# EAGLE board CC3000_WiFi_Shield_Panel_v10 (EAGLE 6.5.0), part 1 of 2
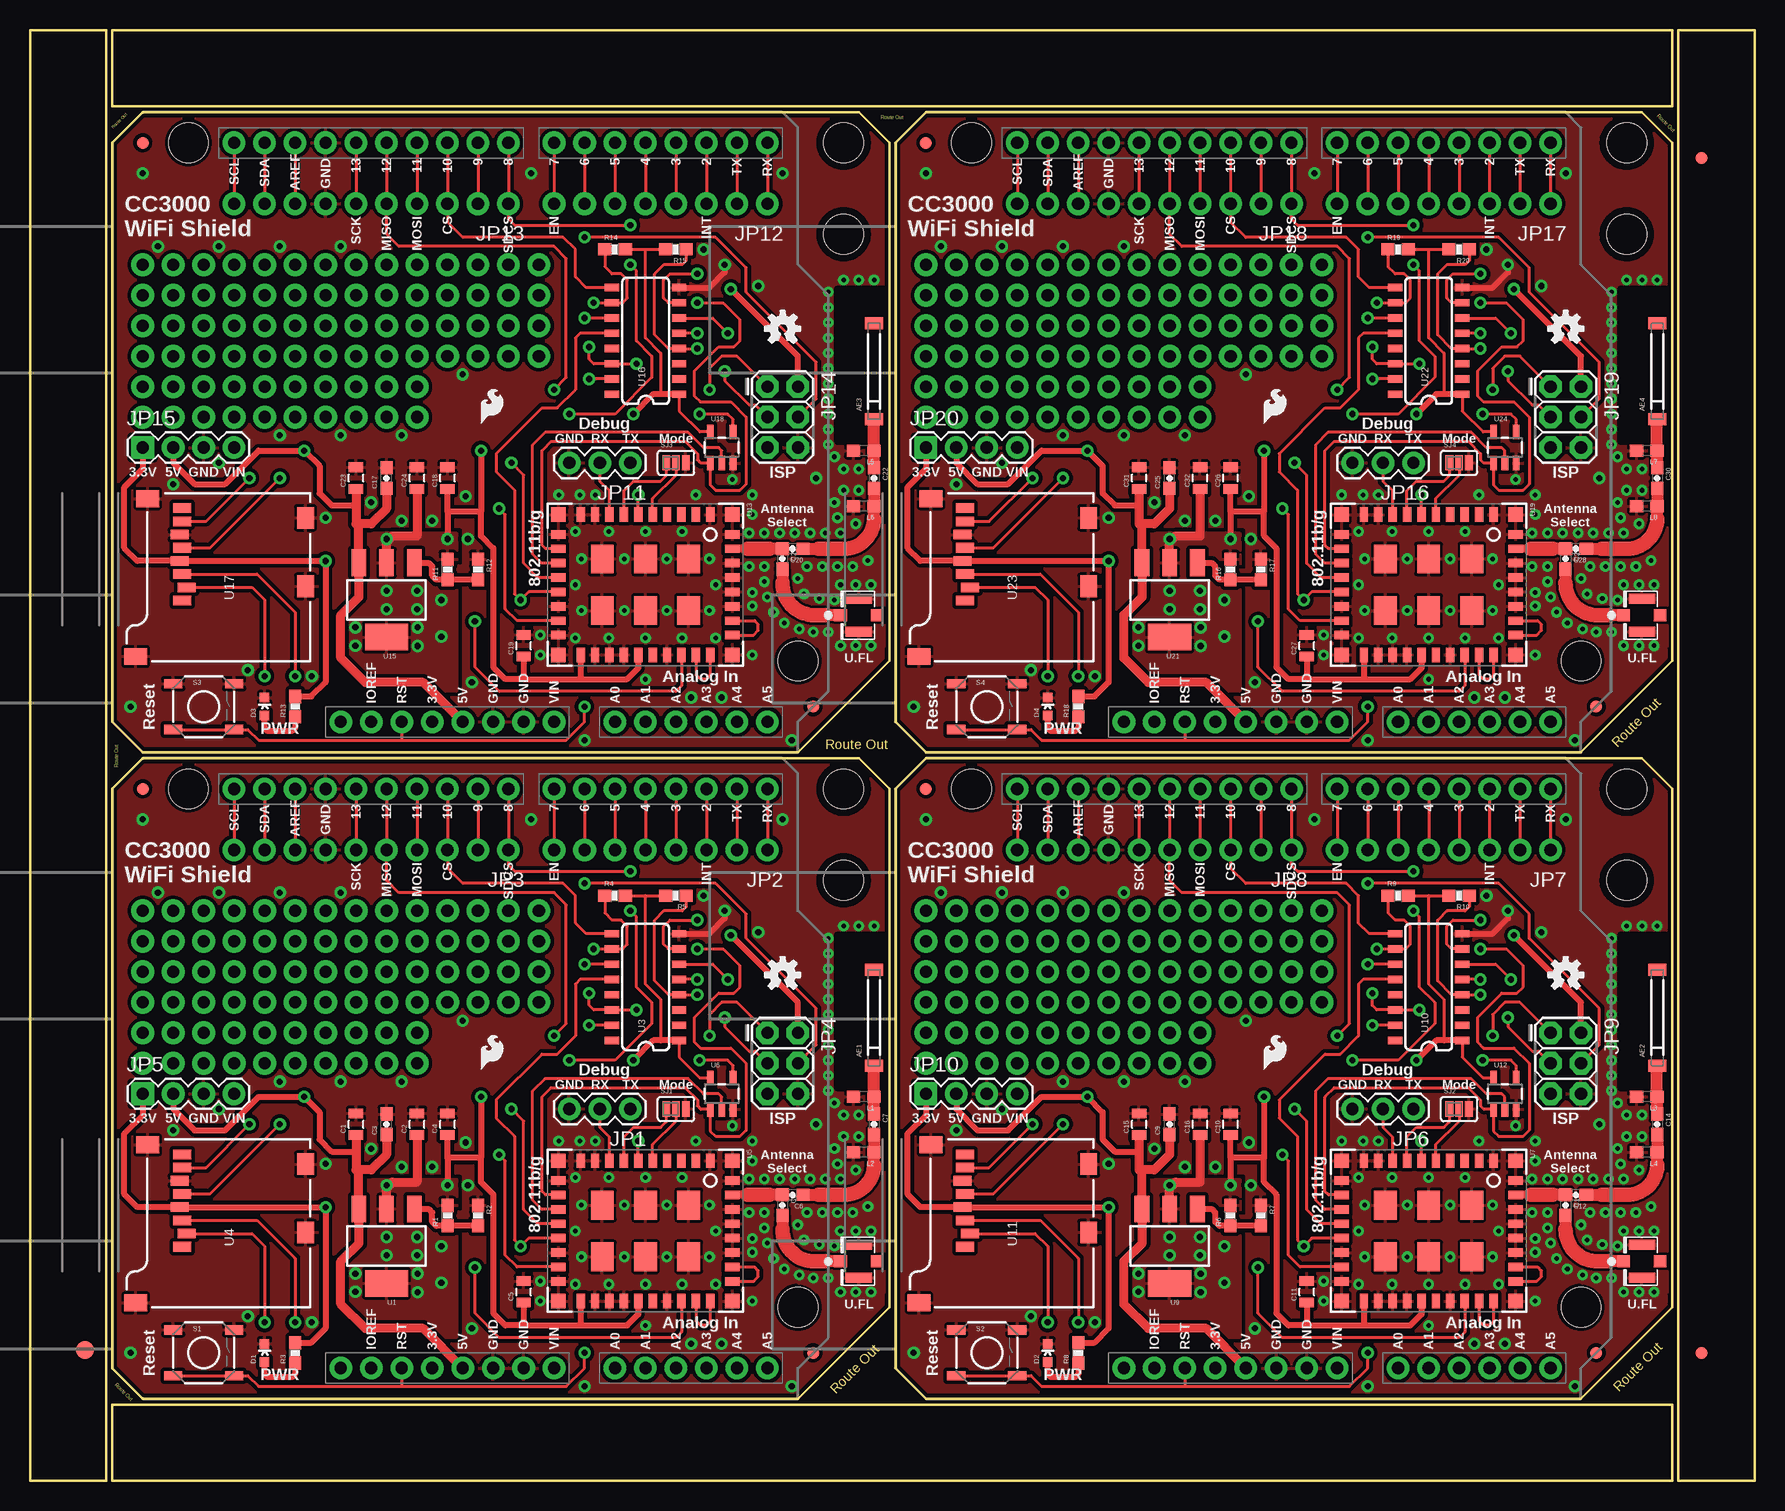
[diagram p0: board, top side]
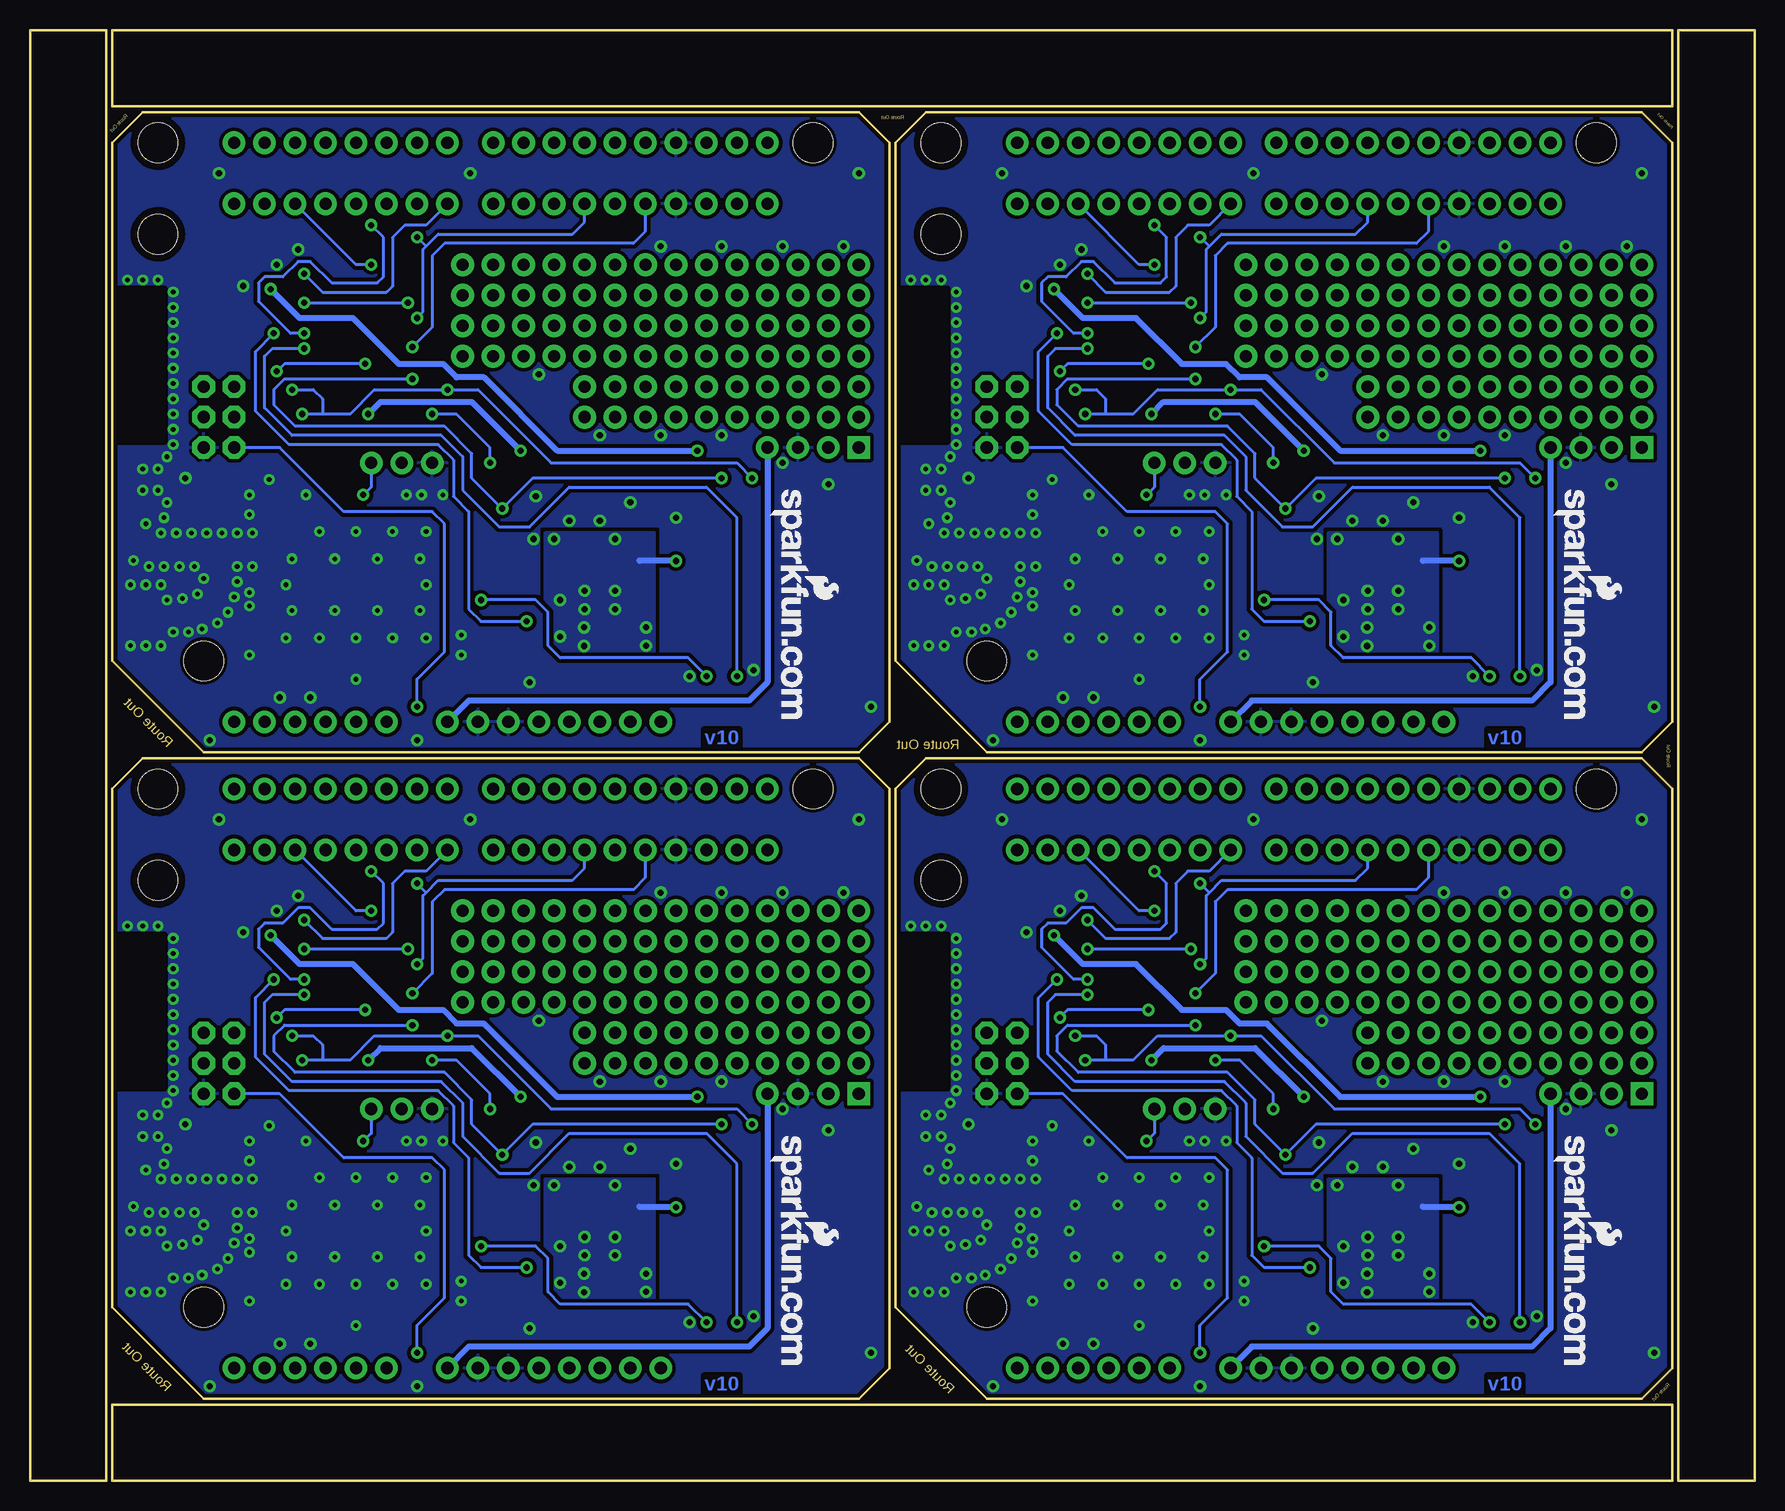
[diagram p1: board, bottom side, seen from below]

Size 143.76 x 120.9 mm. Coordinates in mm from the lower left corner, seen from the top.
Outline: 6.86,9.4 6.86,57.66 9.4,60.2 69.09,60.2 71.63,57.66 71.63,14.48 64.01,6.86 9.4,6.86 6.86,9.4
Outline: 72.14,9.4 72.14,57.66 74.68,60.2 134.37,60.2 136.91,57.66 136.91,14.48 129.29,6.86 74.68,6.86 72.14,9.4
Outline: 6.86,63.25 6.86,111.51 9.4,114.05 69.09,114.05 71.63,111.51 71.63,68.33 64.01,60.71 9.4,60.71 6.86,63.25
Outline: 72.14,63.25 72.14,111.51 74.68,114.05 134.37,114.05 136.91,111.51 136.91,68.33 129.29,60.71 74.68,60.71 72.14,63.25
Outline: 6.35,0 6.35,120.9 0,120.9 0,0 6.35,0
Outline: 6.86,0 136.91,0 136.91,6.35 6.86,6.35 6.86,0
Outline: 143.76,0 143.76,120.9 137.41,120.9 137.41,0 143.76,0
Outline: 136.91,120.9 6.86,120.9 6.86,114.55 136.91,114.55 136.91,120.9
Copper layers (1*16): Top 0.035mm / dielectric 1.5mm / Bottom 0.035mm
Design rules "SparkFun-2-layer": minimum track width 7mil, minimum drill 15mil, track to track 8mil, track to pad 8mil, pad to pad 8mil, via to via 8mil, smd to smd 8mil, copper to edge 8mil, drill to drill 8mil, minimum pad ring 12mil, minimum via ring 10mil, stop-mask expansion 4mil, vias tented up to drill 20mil, thermal gap 10mil
Holes 3.3 mm at 13.21,57.66 64.01,14.48 78.49,57.66 129.29,14.48 13.21,111.51 64.01,68.33 78.49,111.51 129.29,68.33
tRestrict: area 68.3,17.5 to 69.8,19.1; area 67.3,43.4 to 71.1,45.5; area 67.3,32.8 to 69.3,45.5; area 69.3,35.3 to 71.1,41.9; area 133.6,17.5 to 135.1,19.1; area 132.6,43.4 to 136.4,45.5; area 132.6,32.8 to 134.6,45.5; area 134.6,35.3 to 136.4,41.9; area 68.3,71.4 to 69.8,72.9; area 67.3,97.3 to 71.1,99.3; area 67.3,86.6 to 69.3,99.3; area 69.3,89.2 to 71.1,95.8; 4 more areas
bRestrict: area 67.3,32.8 to 71.1,45.5; area 132.6,32.8 to 136.4,45.5; area 67.3,86.6 to 71.1,99.3; area 132.6,86.6 to 136.4,99.3

## Footprints (pad centres in the part's own frame; a part is rotated, then mirrored left to right if it is on the bottom)
ANTENNA-CHIP_2500AT44M0400 = smd 1 x 1.5: FEED -4,0; NC 4,0
0805 = smd 0.8 x 1.2: 1 -0.9,0; 2 0.9,0
0603-CAP = smd 1.1 x 1: 1 -0.85,0; 2 0.85,0
LED-0603 = smd 0.8 x 0.8: A 0,-0.75; C 0,0.75
FIDUCIAL-1.5X3 = smd 1.5 x 1.5: 1 0,0
FIDUCIAL-1X2 = smd 1 x 1: 1 0,0
U.FL = smd 2.2 x 0.85: P$1 0,1.375; P$2 0,-1.375 | smd 1.05 x 1: P$3 1.525,0; P$4 -1.525,0
1X03 = drill 1.016 pad 1.88: 1 0,0; 2 2.54,0; 3 5.08,0
1X08_NO_SILK = drill 1.016 pad 1.88: 1 0,0; 2 2.54,0; 3 5.08,0; 4 7.62,0; 5 10.16,0; 6 12.7,0; 7 15.24,0; 8 17.78,0
1X10_NO_SILK = drill 1.016 pad 1.88: 1 0,0; 2 2.54,0; 3 5.08,0; 4 7.62,0; 5 10.16,0; 6 12.7,0; 7 15.24,0; 8 17.78,0; 9 20.32,0; 10 22.86,0
2X3 = drill 1.016 pad 1.88 octagon: 1 0,0; 2 0,2.54; 3 2.54,0; 4 2.54,2.54; 5 5.08,0; 6 5.08,2.54
1X04 = drill 1.016 pad 1.88 square: 1 0,0 | drill 1.016 pad 1.88: 2 2.54,0; 3 5.08,0; 4 7.62,0
0603 = smd 1.1 x 1: 1 -0.85,0; 2 0.85,0
0603-RES = smd 1.1 x 1: 1 -0.85,0; 2 0.85,0
TACTILE_SWITCH_SMD = smd 1.524 x 0.762: 1 -2.54,1.905; 2 2.54,1.905; 3 -2.54,-1.905; 4 2.54,-1.905
SJ_3_PASTE1&2 = smd 0.635 x 1.27: 1 -0.813,0; 2 0,0; 3 0.813,0
STAND-OFF = hole 3.302: 0,0
SOT223 = smd 1.219 x 2.235: 1 -2.311,-3.099; 2 0,-3.099; 3 2.311,-3.099 | smd 3.6 x 2.2: 4 0,3.099
UNO_R3_SHIELD_NOLABELS = drill 1.016 pad 1.88: 3.3V 50.8,26.67; 5V 50.8,29.21; A0 50.8,41.91; A1 50.8,44.45; A2 50.8,46.99; A3 50.8,49.53; A4 50.8,52.07; A5 50.8,54.61; AREF 2.54,15.24; D2 2.54,49.53; D3 2.54,46.99; D4 2.54,44.45; D5 2.54,41.91; D6 2.54,39.37; D7 2.54,36.83; D8 2.54,33.02; D9 2.54,30.48; D10 2.54,27.94; D11 2.54,25.4; D12 2.54,22.86; D13 2.54,20.32; GND@0 50.8,31.75; GND@1 50.8,34.29; GND@2 2.54,17.78; IOREF 50.8,21.59; NC 50.8,19.05; RES 50.8,24.13; RX 2.54,54.61; SCL 2.54,10.16; SDA 2.54,12.7; TX 2.54,52.07; VIN 50.8,36.83
SO016 = smd 0.6 x 1.2: 1 -4.445,-2.8; 2 -3.175,-2.8; 3 -1.905,-2.8; 4 -0.635,-2.8; 5 0.635,-2.8; 6 1.905,-2.8; 7 3.175,-2.8; 8 4.445,-2.8; 9 4.445,2.8; 10 3.175,2.8; 11 1.905,2.8; 12 0.635,2.8; 13 -0.635,2.8; 14 -1.905,2.8; 15 -3.175,2.8; 16 -4.445,2.8
MICRO-SD-SOCKET-PP = smd 0.8 x 1.5: 1 -8.94,10.7; 2 -7.84,10.3; 3 -6.74,10.7; 4 -5.64,10.9; 5 -4.54,10.7; 6 -3.44,10.9; 7 -2.34,10.7; 8 -1.24,10.7 | smd 1.8 x 1.4: CD1 -2.05,0.4; CD2 -7.75,0.4 | smd 1.4 x 1.9: GND1 -13.6,14.55; GND3 -0.45,13.55
QFN-46_CC3000 = smd 2.4 x 1.9: GND@37 -2.15,3.6; GND@38 -2.15,0; GND@39 -2.15,-3.6; GND@40 2.15,3.6; GND@41 2.15,0; GND@42 2.15,-3.6 | smd 1.2 x 1.2: GND@43 -5.85,7.25; GND@44 -5.85,-7.25; GND@45 5.85,-7.25; GND@46 5.85,7.25 | smd 1.2 x 0.7: P$1 -5.85,5.4; P$2 -5.85,4.2; P$3 -5.85,3; P$4 -5.85,1.8; P$5 -5.85,0.6; P$6 -5.85,-0.6; P$7 -5.85,-1.8; P$8 -5.85,-3; P$9 -5.85,-4.2; P$10 -5.85,-5.4; P$19 5.85,-5.4; P$20 5.85,-4.2; P$21 5.85,-3; P$22 5.85,-1.8; P$23 5.85,-0.6; P$24 5.85,0.6; P$25 5.85,1.8; P$26 5.85,3; P$27 5.85,4.2; P$28 5.85,5.4 | smd 0.7 x 1.2: P$11 -4.2,-7.25; P$12 -3,-7.25; P$13 -1.8,-7.25; P$14 -0.6,-7.25; P$15 0.6,-7.25; P$16 1.8,-7.25; P$17 3,-7.25; P$18 4.2,-7.25; P$29 4.2,7.25; P$30 3,7.25; P$31 1.8,7.25; P$32 0.6,7.25; P$33 -0.6,7.25; P$34 -1.8,7.25; P$35 -3,7.25; P$36 -4.2,7.25
SOT23-5 = smd 0.55 x 1.2: 1 -0.95,-1.3; 2 0,-1.3; 3 0.95,-1.3; 4 0.95,1.3; 5 -0.95,1.3

## Placement (x,y rotation side)
AE1  ANTENNA22500AT44M0400  [ANTENNA-CHIP_2500AT44M0400]  70.36,38.61 90 top
AE2  ANTENNA22500AT44M0400  [ANTENNA-CHIP_2500AT44M0400]  135.64,38.61 90 top
AE3  ANTENNA22500AT44M0400  [ANTENNA-CHIP_2500AT44M0400]  70.36,92.46 90 top
AE4  ANTENNA22500AT44M0400  [ANTENNA-CHIP_2500AT44M0400]  135.64,92.46 90 top
C1  10uF  [0805]  27.18,29.72 90 top
C2  10uF  [0805]  32.26,29.72 90 top
C3  0.1uF  [0603-CAP]  29.72,29.72 90 top
C4  1uF  [0805]  34.8,29.72 90 top
C5  1uF  [0805]  41.15,15.75 90 top
C6  10pF  [0603-CAP]  63.58,23.83 180 top
C7  2.2pF  [0603-CAP]  70.36,29.72 270 top
C8  DNP  [0603-CAP]  62.71,22.99 270 top
C9  0.1uF  [0603-CAP]  95,29.72 90 top
C10  1uF  [0805]  100.08,29.72 90 top
C11  1uF  [0805]  106.43,15.75 90 top
C12  10pF  [0603-CAP]  128.85,23.83 180 top
C13  DNP  [0603-CAP]  127.99,22.99 270 top
C14  2.2pF  [0603-CAP]  135.64,29.72 270 top
C15  10uF  [0805]  92.46,29.72 90 top
C16  10uF  [0805]  97.54,29.72 90 top
C17  0.1uF  [0603-CAP]  29.72,83.57 90 top
C18  1uF  [0805]  34.8,83.57 90 top
C19  1uF  [0805]  41.15,69.6 90 top
C20  10pF  [0603-CAP]  63.58,77.67 180 top
C21  DNP  [0603-CAP]  62.71,76.83 270 top
C22  2.2pF  [0603-CAP]  70.36,83.57 270 top
C23  10uF  [0805]  27.18,83.57 90 top
C24  10uF  [0805]  32.26,83.57 90 top
C25  0.1uF  [0603-CAP]  95,83.57 90 top
C26  1uF  [0805]  100.08,83.57 90 top
C27  1uF  [0805]  106.43,69.6 90 top
C28  10pF  [0603-CAP]  128.85,77.67 180 top
C29  DNP  [0603-CAP]  127.99,76.83 270 top
C30  2.2pF  [0603-CAP]  135.64,83.57 270 top
C31  10uF  [0805]  92.46,83.57 90 top
C32  10uF  [0805]  97.54,83.57 90 top
D1  GREEN  [LED-0603]  19.56,10.67 0 top
D2  GREEN  [LED-0603]  84.84,10.67 0 top
D3  GREEN  [LED-0603]  19.56,64.52 0 top
D4  GREEN  [LED-0603]  84.84,64.52 0 top
E$1  [FIDUCIAL-1.5X3]  4.57,10.92 0 top
E$4  [FIDUCIAL-1X2]  139.32,10.67 0 top
E$5  [FIDUCIAL-1X2]  139.32,110.24 180 top
FID1  FIDUCIAL1X2  [FIDUCIAL-1X2]  65.28,10.67 0 top
FID2  FIDUCIAL1X2  [FIDUCIAL-1X2]  9.4,57.66 0 top
FID3  FIDUCIAL1X2  [FIDUCIAL-1X2]  130.56,10.67 0 top
FID4  FIDUCIAL1X2  [FIDUCIAL-1X2]  74.68,57.66 0 top
FID5  FIDUCIAL1X2  [FIDUCIAL-1X2]  65.28,64.52 0 top
FID6  FIDUCIAL1X2  [FIDUCIAL-1X2]  9.4,111.51 0 top
FID7  FIDUCIAL1X2  [FIDUCIAL-1X2]  130.56,64.52 0 top
FID8  FIDUCIAL1X2  [FIDUCIAL-1X2]  74.68,111.51 0 top
J1  U.FL  [U.FL]  69.09,18.29 180 top
J2  U.FL  [U.FL]  134.37,18.29 180 top
J3  U.FL  [U.FL]  69.09,72.14 180 top
J4  U.FL  [U.FL]  134.37,72.14 180 top
JP1  Debug  [1X03]  50.04,30.99 180 top
JP2  [1X08_NO_SILK]  61.47,52.58 180 top
JP3  M10NO_SILK  [1X10_NO_SILK]  39.88,52.58 180 top
JP4  AVR_SPI_PRG_6PTH  [2X3]  61.47,37.34 270 top
JP5  [1X04]  9.4,32.26 0 top
JP6  Debug  [1X03]  115.32,30.99 180 top
JP7  [1X08_NO_SILK]  126.75,52.58 180 top
JP8  M10NO_SILK  [1X10_NO_SILK]  105.16,52.58 180 top
JP9  AVR_SPI_PRG_6PTH  [2X3]  126.75,37.34 270 top
JP10  [1X04]  74.68,32.26 0 top
JP11  Debug  [1X03]  50.04,84.84 180 top
JP12  [1X08_NO_SILK]  61.47,106.43 180 top
JP13  M10NO_SILK  [1X10_NO_SILK]  39.88,106.43 180 top
JP14  AVR_SPI_PRG_6PTH  [2X3]  61.47,91.19 270 top
JP15  [1X04]  9.4,86.11 0 top
JP16  Debug  [1X03]  115.32,84.84 180 top
JP17  [1X08_NO_SILK]  126.75,106.43 180 top
JP18  M10NO_SILK  [1X10_NO_SILK]  105.16,106.43 180 top
JP19  AVR_SPI_PRG_6PTH  [2X3]  126.75,91.19 270 top
JP20  [1X04]  74.68,86.11 0 top
L1  DNP  [0603]  69.49,32 180 top
L2  2.2nH  [0603]  69.49,27.38 180 top
L3  DNP  [0603]  134.77,32 180 top
L4  2.2nH  [0603]  134.77,27.38 180 top
L5  DNP  [0603]  69.49,85.85 180 top
L6  2.2nH  [0603]  69.49,81.23 180 top
L7  DNP  [0603]  134.77,85.85 180 top
L8  2.2nH  [0603]  134.77,81.23 180 top
LOGO1  OSHW-LOGOS  [OSHW-LOGO-S]  62.74,42.16 0 top
LOGO2  LOGO-SFENEW  [SFE-NEW-WEBLOGO]  16.76,28.7 270 bottom
LOGO3  LOGO-SFESK  [SFE-LOGO-FLAME]  37.59,34.29 0 top
LOGO4  OSHW-LOGOS  [OSHW-LOGO-S]  128.02,42.16 0 top
LOGO5  LOGO-SFENEW  [SFE-NEW-WEBLOGO]  82.04,28.7 270 bottom
LOGO6  LOGO-SFESK  [SFE-LOGO-FLAME]  102.87,34.29 0 top
LOGO7  OSHW-LOGOS  [OSHW-LOGO-S]  62.74,96.01 0 top
LOGO8  LOGO-SFENEW  [SFE-NEW-WEBLOGO]  16.76,82.55 270 bottom
LOGO9  LOGO-SFESK  [SFE-LOGO-FLAME]  37.59,88.14 0 top
LOGO10  OSHW-LOGOS  [OSHW-LOGO-S]  128.02,96.01 0 top
LOGO11  LOGO-SFENEW  [SFE-NEW-WEBLOGO]  82.04,82.55 270 bottom
LOGO12  LOGO-SFESK  [SFE-LOGO-FLAME]  102.87,88.14 0 top
R1  240  [0603-RES]  34.8,22.1 90 top
R2  390  [0603-RES]  37.34,22.1 270 top
R3  390  [0603-RES]  22.1,10.67 90 top
R4  10k  [0603-RES]  48.77,48.77 0 top
R5  10k  [0603-RES]  53.85,48.77 180 top
R6  240  [0603-RES]  100.08,22.1 90 top
R7  390  [0603-RES]  102.62,22.1 270 top
R8  390  [0603-RES]  87.38,10.67 90 top
R9  10k  [0603-RES]  114.05,48.77 0 top
R10  10k  [0603-RES]  119.13,48.77 180 top
R11  240  [0603-RES]  34.8,75.95 90 top
R12  390  [0603-RES]  37.34,75.95 270 top
R13  390  [0603-RES]  22.1,64.52 90 top
R14  10k  [0603-RES]  48.77,102.62 0 top
R15  10k  [0603-RES]  53.85,102.62 180 top
R16  240  [0603-RES]  100.08,75.95 90 top
R17  390  [0603-RES]  102.62,75.95 270 top
R18  390  [0603-RES]  87.38,64.52 90 top
R19  10k  [0603-RES]  114.05,102.62 0 top
R20  10k  [0603-RES]  119.13,102.62 180 top
S1  RESET  [TACTILE_SWITCH_SMD]  14.48,10.67 0 top
S2  RESET  [TACTILE_SWITCH_SMD]  79.76,10.67 0 top
S3  RESET  [TACTILE_SWITCH_SMD]  14.48,64.52 0 top
S4  RESET  [TACTILE_SWITCH_SMD]  79.76,64.52 0 top
SJ1  Mode  [SJ_3_PASTE1&2]  53.85,30.99 0 top
SJ2  Mode  [SJ_3_PASTE1&2]  119.13,30.99 0 top
SJ3  Mode  [SJ_3_PASTE1&2]  53.85,84.84 0 top
SJ4  Mode  [SJ_3_PASTE1&2]  119.13,84.84 0 top
STANDOFF1  STAND-OFF  [STAND-OFF]  67.82,57.66 0 top
STANDOFF2  STAND-OFF  [STAND-OFF]  67.82,50.04 0 top
STANDOFF3  STAND-OFF  [STAND-OFF]  133.1,57.66 0 top
STANDOFF4  STAND-OFF  [STAND-OFF]  133.1,50.04 0 top
STANDOFF5  STAND-OFF  [STAND-OFF]  67.82,111.51 0 top
STANDOFF6  STAND-OFF  [STAND-OFF]  67.82,103.89 0 top
STANDOFF7  STAND-OFF  [STAND-OFF]  133.1,111.51 0 top
STANDOFF8  STAND-OFF  [STAND-OFF]  133.1,103.89 0 top
U1  LM1117  [SOT223]  29.72,19.56 180 top
U2  ARDUINO_R3_SHIELDNOLABELS  [UNO_R3_SHIELD_NOLABELS]  6.86,60.2 270 top
U3  74HC4050  [SO016]  51.31,41.15 90 top
U4  USD-SOCKETNEW  [MICRO-SD-SOCKET-PP]  23.37,28.45 90 top
U5  CC3000  [QFN-46_CC3000]  51.31,20.83 270 top
U6  74AHC1G125  [SOT23-5]  57.66,32.26 0 top
U7  CC3000  [QFN-46_CC3000]  116.59,20.83 270 top
U8  ARDUINO_R3_SHIELDNOLABELS  [UNO_R3_SHIELD_NOLABELS]  72.14,60.2 270 top
U9  LM1117  [SOT223]  95,19.56 180 top
U10  74HC4050  [SO016]  116.59,41.15 90 top
U11  USD-SOCKETNEW  [MICRO-SD-SOCKET-PP]  88.65,28.45 90 top
U12  74AHC1G125  [SOT23-5]  122.94,32.26 0 top
U13  CC3000  [QFN-46_CC3000]  51.31,74.68 270 top
U14  ARDUINO_R3_SHIELDNOLABELS  [UNO_R3_SHIELD_NOLABELS]  6.86,114.05 270 top
U15  LM1117  [SOT223]  29.72,73.41 180 top
U16  74HC4050  [SO016]  51.31,95 90 top
U17  USD-SOCKETNEW  [MICRO-SD-SOCKET-PP]  23.37,82.3 90 top
U18  74AHC1G125  [SOT23-5]  57.66,86.11 0 top
U19  CC3000  [QFN-46_CC3000]  116.59,74.68 270 top
U20  ARDUINO_R3_SHIELDNOLABELS  [UNO_R3_SHIELD_NOLABELS]  72.14,114.05 270 top
U21  LM1117  [SOT223]  95,73.41 180 top
U22  74HC4050  [SO016]  116.59,95 90 top
U23  USD-SOCKETNEW  [MICRO-SD-SOCKET-PP]  88.65,82.3 90 top
U24  74AHC1G125  [SOT23-5]  122.94,86.11 0 top

## Library data of the parts
AE1-AE4 U5 U7 U13 U19 = SparkFun-RF
C1-C5 C8-C11 C13 C15-C19 C21 C23-C27 C29 C31 C32 = SparkFun-Capacitors
C6 C12 C20 C28 = SparkFun-Capacitors; COEFF: C0G; TOL: 5%
C7 C14 C22 C30 = SparkFun-Capacitors; COEFF: C0G; TOL: 10%
D1-D4 = SparkFun-LED; PROD_ID: DIO-00821
E$1 E$4 E$5 FID1-FID8 LOGO1-LOGO12 = SparkFun-Aesthetics
J1-J4 JP1-JP20 U4 U11 U17 U23 = SparkFun-Connectors
L1-L8 SJ1-SJ4 = SparkFun-Passives
R1-R20 = SparkFun-Resistors
S1-S4 = SparkFun-Electromechanical; PROD_ID: SWCH-08247
STANDOFF1-STANDOFF8 = SparkFun-Electromechanical
U1 U9 U15 U21 = SparkFun-PowerIC
U2 U8 U14 U20 = SparkFun-Boards
U3 U6 U10 U12 U16 U18 U22 U24 = SparkFun-DigitalIC

## Nets
3.3V: C2.1 C4.1 C5.1 JP5.1 R1.2 R3.2 R4.2 R5.2 U1.2 U1.4 U3.1 U4.4 U5.P$19 U5.P$23 U6.5
3.3V1: C10.1 C11.1 C16.1 JP10.1 R6.2 R8.2 R9.2 R10.2 U7.P$19 U7.P$23 U9.2 U9.4 U10.1 U11.4 U12.5
3.3V2: C18.1 C19.1 C24.1 JP15.1 R11.2 R13.2 R14.2 R15.2 U13.P$19 U13.P$23 U15.2 U15.4 U16.1 U17.4 U18.5
3.3V3: C26.1 C27.1 C32.1 JP20.1 R16.2 R18.2 R19.2 R20.2 U19.P$19 U19.P$23 U21.2 U21.4 U22.1 U23.4 U24.5
5V: C1.1 C3.1 JP4.2 JP5.2 U1.3 U2.5V
5V1: C9.1 C15.1 JP9.2 JP10.2 U8.5V U9.3
5V2: C17.1 C23.1 JP14.2 JP15.2 U14.5V U15.3
5V3: C25.1 C31.1 JP19.2 JP20.2 U20.5V U21.3
AREF: JP3.8 U2.AREF
AREF1: JP8.8 U8.AREF
AREF2: JP13.8 U14.AREF
AREF3: JP18.8 U20.AREF
CS_3.3V: R4.1 U3.10 U5.P$12 U6.1
CS_3.3V1: R9.1 U7.P$12 U10.10 U12.1
CS_3.3V2: R14.1 U13.P$12 U16.10 U18.1
CS_3.3V3: R19.1 U19.P$12 U22.10 U24.1
CS_5V: JP3.3 U2.D10 U3.9
CS_5V1: JP8.3 U8.D10 U10.9
CS_5V2: JP13.3 U14.D10 U16.9
CS_5V3: JP18.3 U20.D10 U22.9
EN_3.3V: U3.6 U5.P$26
EN_3.3V1: U7.P$26 U10.6
EN_3.3V2: U13.P$26 U16.6
EN_3.3V3: U19.P$26 U22.6
EN_5V: JP2.8 U2.D7 U3.7
EN_5V1: JP7.8 U8.D7 U10.7
EN_5V2: JP12.8 U14.D7 U16.7
EN_5V3: JP17.8 U20.D7 U22.7
GND: C1.2 C2.2 C3.2 C4.2 C5.2 D1.C J1.P$1 J1.P$2 JP1.3 JP3.7 JP4.6 JP5.3 L1.2 L2.2 R2.1 S1.1 S1.2 SJ1.3 U2.GND@0 U2.GND@1 U2.GND@2 U3.8 U4.6 U4.CD1 U4.CD2 U4.GND1 U4.GND3 U5.GND@37 U5.GND@38 U5.GND@39 U5.GND@40 U5.GND@41 U5.GND@42 U5.GND@43 U5.GND@44 U5.GND@45 U5.GND@46 U5.P$1 U5.P$9 U5.P$10 U5.P$11 U5.P$16 U5.P$18 U5.P$20 U5.P$21 U5.P$22 U5.P$25 U5.P$31 U5.P$32 U5.P$33 U5.P$34 U5.P$36 U6.3
GND1: C9.2 C10.2 C11.2 C15.2 C16.2 D2.C J2.P$1 J2.P$2 JP6.3 JP8.7 JP9.6 JP10.3 L3.2 L4.2 R7.1 S2.1 S2.2 SJ2.3 U7.GND@37 U7.GND@38 U7.GND@39 U7.GND@40 U7.GND@41 U7.GND@42 U7.GND@43 U7.GND@44 U7.GND@45 U7.GND@46 U7.P$1 U7.P$9 U7.P$10 U7.P$11 U7.P$16 U7.P$18 U7.P$20 U7.P$21 U7.P$22 U7.P$25 U7.P$31 U7.P$32 U7.P$33 U7.P$34 U7.P$36 U8.GND@0 U8.GND@1 U8.GND@2 U10.8 U11.6 U11.CD1 U11.CD2 U11.GND1 U11.GND3 U12.3
GND2: C17.2 C18.2 C19.2 C23.2 C24.2 D3.C J3.P$1 J3.P$2 JP11.3 JP13.7 JP14.6 JP15.3 L5.2 L6.2 R12.1 S3.1 S3.2 SJ3.3 U13.GND@37 U13.GND@38 U13.GND@39 U13.GND@40 U13.GND@41 U13.GND@42 U13.GND@43 U13.GND@44 U13.GND@45 U13.GND@46 U13.P$1 U13.P$9 U13.P$10 U13.P$11 U13.P$16 U13.P$18 U13.P$20 U13.P$21 U13.P$22 U13.P$25 U13.P$31 U13.P$32 U13.P$33 U13.P$34 U13.P$36 U14.GND@0 U14.GND@1 U14.GND@2 U16.8 U17.6 U17.CD1 U17.CD2 U17.GND1 U17.GND3 U18.3
GND3: C25.2 C26.2 C27.2 C31.2 C32.2 D4.C J4.P$1 J4.P$2 JP16.3 JP18.7 JP19.6 JP20.3 L7.2 L8.2 R17.1 S4.1 S4.2 SJ4.3 U19.GND@37 U19.GND@38 U19.GND@39 U19.GND@40 U19.GND@41 U19.GND@42 U19.GND@43 U19.GND@44 U19.GND@45 U19.GND@46 U19.P$1 U19.P$9 U19.P$10 U19.P$11 U19.P$16 U19.P$18 U19.P$20 U19.P$21 U19.P$22 U19.P$25 U19.P$31 U19.P$32 U19.P$33 U19.P$34 U19.P$36 U20.GND@0 U20.GND@1 U20.GND@2 U22.8 U23.6 U23.CD1 U23.CD2 U23.GND1 U23.GND3 U24.3
INT_3.3V: JP2.3 U2.D2 U5.P$14
INT_3.3V1: JP7.3 U7.P$14 U8.D2
INT_3.3V2: JP12.3 U13.P$14 U14.D2
INT_3.3V3: JP17.3 U19.P$14 U20.D2
MISO_3.3V: JP3.5 JP4.1 U2.D12 U4.7 U6.4
MISO_3.3V1: JP8.5 JP9.1 U8.D12 U11.7 U12.4
MISO_3.3V2: JP13.5 JP14.1 U14.D12 U17.7 U18.4
MISO_3.3V3: JP18.5 JP19.1 U20.D12 U23.7 U24.4
MOSI_3.3V: U3.12 U4.3 U5.P$15
MOSI_3.3V1: U7.P$15 U10.12 U11.3
MOSI_3.3V2: U13.P$15 U16.12 U17.3
MOSI_3.3V3: U19.P$15 U22.12 U23.3
MOSI_5V: JP3.4 JP4.4 U2.D11 U3.11
MOSI_5V1: JP8.4 JP9.4 U8.D11 U10.11
MOSI_5V2: JP13.4 JP14.4 U14.D11 U16.11
MOSI_5V3: JP18.4 JP19.4 U20.D11 U22.11
N$1: R6.1 R7.2 U9.1
N$2: R1.1 R2.2 U1.1
N$3: SJ1.2 U5.P$5
N$4: SJ1.1 U5.P$7
N$5: C6.1 C7.2 L2.1
N$6: U5.P$27 U5.P$28
N$7: U5.P$29 U5.P$30
N$8: C6.2 C8.1 U5.P$35
N$9: C8.2 J1.P$3
N$10: AE1.FEED C7.1 L1.1
N$11: D1.A R3.1
N$35: SJ2.2 U7.P$5
N$36: SJ2.1 U7.P$7
N$37: U7.P$27 U7.P$28
N$38: U7.P$29 U7.P$30
N$39: C12.1 C14.2 L4.1
N$93: AE2.FEED C14.1 L3.1
N$94: C13.2 J2.P$3
N$95: D2.A R8.1
N$125: JP2.1 U2.RX
N$126: JP2.2 U2.TX
N$127: JP2.4 U2.D3
N$128: JP2.6 U2.D5
N$129: JP2.7 U2.D6
N$130: JP2.5 U2.D4
N$131: JP3.2 U2.D9
N$132: C12.2 C13.1 U7.P$35
N$209: JP7.4 U8.D3
N$210: JP7.6 U8.D5
N$211: JP7.7 U8.D6
N$212: JP7.1 U8.RX
N$213: JP7.2 U8.TX
N$214: JP8.2 U8.D9
N$215: JP7.5 U8.D4
N$216: R11.1 R12.2 U15.1
N$217: SJ3.2 U13.P$5
N$218: SJ3.1 U13.P$7
N$219: U13.P$27 U13.P$28
N$220: U13.P$29 U13.P$30
N$221: C20.1 C22.2 L6.1
N$222: AE3.FEED C22.1 L5.1
N$223: C21.2 J3.P$3
N$224: D3.A R13.1
N$225: C20.2 C21.1 U13.P$35
N$302: JP12.4 U14.D3
N$303: JP12.6 U14.D5
N$304: JP12.7 U14.D6
N$305: JP12.1 U14.RX
N$306: JP12.2 U14.TX
N$307: JP13.2 U14.D9
N$308: JP12.5 U14.D4
N$309: R16.1 R17.2 U21.1
N$310: SJ4.2 U19.P$5
N$311: SJ4.1 U19.P$7
N$312: U19.P$27 U19.P$28
N$313: U19.P$29 U19.P$30
N$314: C28.1 C30.2 L8.1
N$315: AE4.FEED C30.1 L7.1
N$316: C29.2 J4.P$3
N$317: D4.A R18.1
N$318: C28.2 C29.1 U19.P$35
N$395: JP17.4 U20.D3
N$396: JP17.6 U20.D5
N$397: JP17.7 U20.D6
N$398: JP17.1 U20.RX
N$399: JP17.2 U20.TX
N$400: JP18.2 U20.D9
N$401: JP17.5 U20.D4
RESET: JP4.5 S1.3 S1.4 U2.RES
RESET1: JP9.5 S2.3 S2.4 U8.RES
RESET2: JP14.5 S3.3 S3.4 U14.RES
RESET3: JP19.5 S4.3 S4.4 U20.RES
SCK_3.3V: U3.15 U4.5 U5.P$17
SCK_3.3V1: U7.P$17 U10.15 U11.5
SCK_3.3V2: U13.P$17 U16.15 U17.5
SCK_3.3V3: U19.P$17 U22.15 U23.5
SCK_5V: JP3.6 JP4.3 U2.D13 U3.14
SCK_5V1: JP8.6 JP9.3 U8.D13 U10.14
SCK_5V2: JP13.6 JP14.3 U14.D13 U16.14
SCK_5V3: JP18.6 JP19.3 U20.D13 U22.14
SCL: JP3.10 U2.SCL
SCL1: JP8.10 U8.SCL
SCL2: JP13.10 U14.SCL
SCL3: JP18.10 U20.SCL
SD_CS_3.3V: R5.1 U3.4 U4.2
SD_CS_3.3V1: R10.1 U10.4 U11.2
SD_CS_3.3V2: R15.1 U16.4 U17.2
SD_CS_3.3V3: R20.1 U22.4 U23.2
SD_CS_5V: JP3.1 U2.D8 U3.5
SD_CS_5V1: JP8.1 U8.D8 U10.5
SD_CS_5V2: JP13.1 U14.D8 U16.5
SD_CS_5V3: JP18.1 U20.D8 U22.5
SDA: JP3.9 U2.SDA
SDA1: JP8.9 U8.SDA
SDA2: JP13.9 U14.SDA
SDA3: JP18.9 U20.SDA
VIN: JP5.4 U2.VIN
VIN1: JP10.4 U8.VIN
VIN2: JP15.4 U14.VIN
VIN3: JP20.4 U20.VIN
WIFI_MISO: U5.P$13 U6.2
WIFI_MISO1: U7.P$13 U12.2
WIFI_MISO2: U13.P$13 U18.2
WIFI_MISO3: U19.P$13 U24.2
WIFI_RX: JP1.2 U5.P$8
WIFI_RX1: JP6.2 U7.P$8
WIFI_RX2: JP11.2 U13.P$8
WIFI_RX3: JP16.2 U19.P$8
WIFI_TX: JP1.1 U5.P$6
WIFI_TX1: JP6.1 U7.P$6
WIFI_TX2: JP11.1 U13.P$6
WIFI_TX3: JP16.1 U19.P$6

## Tracks (layer width: path | path; a pad name or v marks a point on that pad's centre or on a via)
3.3V  (via drill 0.51)
  Top 0.254: R4.2 51.31,48.77 | 51.31,48.77 R5.2 | U3.1 54.11,35.3 55.85,33.56 U6.5 | 52.58,36.7 52.58,40.13 51.31,41.4 51.31,48.77
  Top 0.508: 45.97,12.95 49.78,12.95 50.71,13.88 U5.P$23 | U5.P$19 45.91,13.02 45.97,12.95 | 41.15,12.95 45.97,12.95 | C5.1 41.15,12.95 | 41.15,12.95 39.62,12.95 38.61,13.97 38.61,23.88 37.59,24.89 37.59,26.92 | v37.59,32 37.59,26.92 | 34.8,26.92 C4.1 | 34.8,22.86 R1.2 | 37.59,26.92 34.8,26.92 | 34.8,26.92 v34.8,24.64 | v50.29,35.05 51.94,36.7 52.58,36.7 U3.1 | R3.2 23.46,11.52 24.64,12.7 v24.64,22.81 U4.4 8.94,22.81 7.87,23.88 7.87,28.96 9.4,30.48 JP5.1
  Top 0.762: U1.2 29.72,24.38 30.23,24.89 32.26,24.89 C2.1
  Bottom 0.508: v24.64,22.81 27.64,22.81 27.69,22.86 | v37.59,32 41.66,36.07 49.28,36.07 v50.29,35.05
  other vias: 27.13,17.27 27.13,15.75 32.31,17.27 32.31,15.72 29.72,20.32 29.72,18.8 32.26,18.8 32.26,20.32 29.72,24.64 34.29,16.51 34.29,19.56
  pour Bottom (isolate 0.305): 26.42,14.99 26.42,25.15 35.56,25.15 35.56,14.99
  pour Top (isolate 0.305): 26.42,11.94 26.42,25.15 35.56,25.15 35.56,11.94
3.3V1  (via drill 0.51)
  Top 0.254: R9.2 116.59,48.77 | 116.59,48.77 R10.2 | U10.1 119.39,35.3 121.13,33.56 U12.5 | 117.86,36.7 117.86,40.13 116.59,41.4 116.59,48.77
  Top 0.508: 111.25,12.95 115.06,12.95 115.99,13.88 U7.P$23 | U7.P$19 111.19,13.02 111.25,12.95 | 106.43,12.95 111.25,12.95 | C11.1 106.43,12.95 | 106.43,12.95 104.9,12.95 103.89,13.97 103.89,23.88 102.87,24.89 102.87,26.92 | v102.87,32 102.87,26.92 | 100.08,26.92 C10.1 | 100.08,22.86 R6.2 | 102.87,26.92 100.08,26.92 | 100.08,26.92 v100.08,24.64 | v115.57,35.05 117.22,36.7 117.86,36.7 U10.1 | R8.2 88.73,11.52 89.92,12.7 v89.92,22.81 U11.4 74.22,22.81 73.15,23.88 73.15,28.96 74.68,30.48 JP10.1
  Top 0.762: U9.2 95,24.38 95.5,24.89 97.54,24.89 C16.1
  Bottom 0.508: v89.92,22.81 92.91,22.81 92.96,22.86 | v102.87,32 106.93,36.07 114.55,36.07 v115.57,35.05
  other vias: 92.41,17.27 92.41,15.75 97.59,17.27 97.59,15.72 95,20.32 95,18.8 97.54,18.8 97.54,20.32 95,24.64 99.57,16.51 99.57,19.56
  pour Bottom (isolate 0.305): 91.69,14.99 91.69,25.15 100.84,25.15 100.84,14.99
  pour Top (isolate 0.305): 91.69,11.94 91.69,25.15 100.84,25.15 100.84,11.94
3.3V2  (via drill 0.51)
  Top 0.254: R14.2 51.31,102.62 | 51.31,102.62 R15.2 | U16.1 54.11,89.15 55.85,87.41 U18.5 | 52.58,90.55 52.58,93.98 51.31,95.25 51.31,102.62
  Top 0.508: 45.97,66.8 49.78,66.8 50.71,67.73 U13.P$23 | U13.P$19 45.91,66.87 45.97,66.8 | 41.15,66.8 45.97,66.8 | C19.1 41.15,66.8 | 41.15,66.8 39.62,66.8 38.61,67.82 38.61,77.72 37.59,78.74 37.59,80.77 | v37.59,85.85 37.59,80.77 | 34.8,80.77 C18.1 | 34.8,76.71 R11.2 | 37.59,80.77 34.8,80.77 | 34.8,80.77 v34.8,78.49 | v50.29,88.9 51.94,90.55 52.58,90.55 U16.1 | R13.2 23.46,65.37 24.64,66.55 v24.64,76.66 U17.4 8.94,76.66 7.87,77.72 7.87,82.8 9.4,84.33 JP15.1
  Top 0.762: U15.2 29.72,78.23 30.23,78.74 32.26,78.74 C24.1
  Bottom 0.508: v24.64,76.66 27.64,76.66 27.69,76.71 | v37.59,85.85 41.66,89.92 49.28,89.92 v50.29,88.9
  other vias: 27.13,71.12 27.13,69.6 32.31,71.12 32.31,69.57 29.72,74.17 29.72,72.64 32.26,72.64 32.26,74.17 29.72,78.49 34.29,70.36 34.29,73.41
  pour Bottom (isolate 0.305): 26.42,68.83 26.42,78.99 35.56,78.99 35.56,68.83
  pour Top (isolate 0.305): 26.42,65.79 26.42,78.99 35.56,78.99 35.56,65.79
3.3V3  (via drill 0.51)
  Top 0.254: R19.2 116.59,102.62 | 116.59,102.62 R20.2 | U22.1 119.39,89.15 121.13,87.41 U24.5 | 117.86,90.55 117.86,93.98 116.59,95.25 116.59,102.62
  Top 0.508: 111.25,66.8 115.06,66.8 115.99,67.73 U19.P$23 | U19.P$19 111.19,66.87 111.25,66.8 | 106.43,66.8 111.25,66.8 | C27.1 106.43,66.8 | 106.43,66.8 104.9,66.8 103.89,67.82 103.89,77.72 102.87,78.74 102.87,80.77 | v102.87,85.85 102.87,80.77 | 100.08,80.77 C26.1 | 100.08,76.71 R16.2 | 102.87,80.77 100.08,80.77 | 100.08,80.77 v100.08,78.49 | v115.57,88.9 117.22,90.55 117.86,90.55 U22.1 | R18.2 88.73,65.37 89.92,66.55 v89.92,76.66 U23.4 74.22,76.66 73.15,77.72 73.15,82.8 74.68,84.33 JP20.1
  Top 0.762: U21.2 95,78.23 95.5,78.74 97.54,78.74 C32.1
  Bottom 0.508: v89.92,76.66 92.91,76.66 92.96,76.71 | v102.87,85.85 106.93,89.92 114.55,89.92 v115.57,88.9
  other vias: 92.41,71.12 92.41,69.6 97.59,71.12 97.59,69.57 95,74.17 95,72.64 97.54,72.64 97.54,74.17 95,78.49 99.57,70.36 99.57,73.41
  pour Bottom (isolate 0.305): 91.69,68.83 91.69,78.99 100.84,78.99 100.84,68.83
  pour Top (isolate 0.305): 91.69,65.79 91.69,78.99 100.84,78.99 100.84,65.79
5V  (via drill 0.51)
  Top 0.508: JP5.2 11.94,30.99 13.72,29.21 16.26,29.21 19.05,32 v22.86,32 24.13,30.73 24.13,28.45 25.15,27.43 27.18,27.43 | JP4.2 64.01,39.88 v58.42,45.47
  Top 0.762: U2.5V 32.77,12.7 27.94,12.7 25.91,14.73 25.91,18.29 27.43,19.81 27.43,22.63 U1.3 27.41,25.68 27.18,25.91 | C1.1 27.18,27.43 27.18,25.91 | C3.1 29.72,27.18 28.45,25.91 27.18,25.91
  Bottom 0.508: v22.86,32 34.54,32 40.64,38.1 42.93,38.1 44.07,39.24 47.75,39.24 51.56,43.05 56.01,43.05 v58.42,45.47
5V1  (via drill 0.51)
  Top 0.508: JP10.2 77.22,30.99 78.99,29.21 81.53,29.21 84.33,32 v88.14,32 89.41,30.73 89.41,28.45 90.42,27.43 92.46,27.43 | JP9.2 129.29,39.88 v123.7,45.47
  Top 0.762: U8.5V 98.04,12.7 93.22,12.7 91.19,14.73 91.19,18.29 92.71,19.81 92.71,22.63 U9.3 92.69,25.68 92.46,25.91 | C15.1 92.46,27.43 92.46,25.91 | C9.1 95,27.18 93.73,25.91 92.46,25.91
  Bottom 0.508: v88.14,32 99.82,32 105.92,38.1 108.2,38.1 109.35,39.24 113.03,39.24 116.84,43.05 121.28,43.05 v123.7,45.47
5V2  (via drill 0.51)
  Top 0.508: JP15.2 11.94,84.84 13.72,83.06 16.26,83.06 19.05,85.85 v22.86,85.85 24.13,84.58 24.13,82.3 25.15,81.28 27.18,81.28 | JP14.2 64.01,93.73 v58.42,99.31
  Top 0.762: U14.5V 32.77,66.55 27.94,66.55 25.91,68.58 25.91,72.14 27.43,73.66 27.43,76.48 U15.3 27.41,79.53 27.18,79.76 | C23.1 27.18,81.28 27.18,79.76 | C17.1 29.72,81.03 28.45,79.76 27.18,79.76
  Bottom 0.508: v22.86,85.85 34.54,85.85 40.64,91.95 42.93,91.95 44.07,93.09 47.75,93.09 51.56,96.9 56.01,96.9 v58.42,99.31
5V3  (via drill 0.51)
  Top 0.508: JP20.2 77.22,84.84 78.99,83.06 81.53,83.06 84.33,85.85 v88.14,85.85 89.41,84.58 89.41,82.3 90.42,81.28 92.46,81.28 | JP19.2 129.29,93.73 v123.7,99.31
  Top 0.762: U20.5V 98.04,66.55 93.22,66.55 91.19,68.58 91.19,72.14 92.71,73.66 92.71,76.48 U21.3 92.69,79.53 92.46,79.76 | C31.1 92.46,81.28 92.46,79.76 | C25.1 95,81.03 93.73,79.76 92.46,79.76
  Bottom 0.508: v88.14,85.85 99.82,85.85 105.92,91.95 108.2,91.95 109.35,93.09 113.03,93.09 116.84,96.9 121.28,96.9 v123.7,99.31
AREF
  Top 0.254: U2.AREF JP3.8
AREF1
  Top 0.254: U8.AREF JP8.8
AREF2
  Top 0.254: U14.AREF JP13.8
AREF3
  Top 0.254: U20.AREF JP18.8
CS_3.3V  (via drill 0.51)
  Top 0.254: R4.1 47.92,47.33 48.51,46.74 49.28,46.74 49.78,46.23 49.78,44.7 49.4,44.32 U3.10 v46.99,44.32 | v55.63,44.32 57.78,44.32 59.18,42.93 59.18,41.15 58.67,40.64 57.4,40.64 55.37,38.61 55.37,36.58 55.88,36.07 58.42,36.07 59.69,34.8 59.69,29.21 59.18,28.7 57.15,28.7 56.71,29.14 U6.1 55.91,30.96 55.63,31.24 55.63,31.75 54.61,32.77 43.43,32.77 42.67,32 42.67,24.13 42.97,23.83 U5.P$12
  Bottom 0.254: v55.63,44.32 v46.99,44.32
CS_3.3V1  (via drill 0.51)
  Top 0.254: R9.1 113.2,47.33 113.79,46.74 114.55,46.74 115.06,46.23 115.06,44.7 114.68,44.32 U10.10 v112.27,44.32 | v120.9,44.32 123.06,44.32 124.46,42.93 124.46,41.15 123.95,40.64 122.68,40.64 120.65,38.61 120.65,36.58 121.16,36.07 123.7,36.07 124.97,34.8 124.97,29.21 124.46,28.7 122.43,28.7 121.99,29.14 U12.1 121.19,30.96 120.9,31.24 120.9,31.75 119.89,32.77 108.71,32.77 107.95,32 107.95,24.13 108.25,23.83 U7.P$12
  Bottom 0.254: v120.9,44.32 v112.27,44.32
CS_3.3V2  (via drill 0.51)
  Top 0.254: R14.1 47.92,101.18 48.51,100.58 49.28,100.58 49.78,100.08 49.78,98.55 49.4,98.17 U16.10 v46.99,98.17 | v55.63,98.17 57.78,98.17 59.18,96.77 59.18,95 58.67,94.49 57.4,94.49 55.37,92.46 55.37,90.42 55.88,89.92 58.42,89.92 59.69,88.65 59.69,83.06 59.18,82.55 57.15,82.55 56.71,82.99 U18.1 55.91,84.81 55.63,85.09 55.63,85.6 54.61,86.61 43.43,86.61 42.67,85.85 42.67,77.98 42.97,77.68 U13.P$12
  Bottom 0.254: v55.63,98.17 v46.99,98.17
CS_3.3V3  (via drill 0.51)
  Top 0.254: R19.1 113.2,101.18 113.79,100.58 114.55,100.58 115.06,100.08 115.06,98.55 114.68,98.17 U22.10 v112.27,98.17 | v120.9,98.17 123.06,98.17 124.46,96.77 124.46,95 123.95,94.49 122.68,94.49 120.65,92.46 120.65,90.42 121.16,89.92 123.7,89.92 124.97,88.65 124.97,83.06 124.46,82.55 122.43,82.55 121.99,82.99 U24.1 121.19,84.81 120.9,85.09 120.9,85.6 119.89,86.61 108.71,86.61 107.95,85.85 107.95,77.98 108.25,77.68 U19.P$12
  Bottom 0.254: v120.9,98.17 v112.27,98.17
CS_5V
  Top 0.254: U3.9 46.35,45.59 45.47,46.48 45.47,48.77 44.45,49.78 36.07,49.78 34.8,51.05 JP3.3 U2.D10
CS_5V1
  Top 0.254: U10.9 111.63,45.59 110.74,46.48 110.74,48.77 109.73,49.78 101.35,49.78 100.08,51.05 JP8.3 U8.D10
CS_5V2
  Top 0.254: U16.9 46.35,99.44 45.47,100.33 45.47,102.62 44.45,103.63 36.07,103.63 34.8,104.9 JP13.3 U14.D10
CS_5V3
  Top 0.254: U22.9 111.63,99.44 110.74,100.33 110.74,102.62 109.73,103.63 101.35,103.63 100.08,104.9 JP18.3 U20.D10
EN_3.3V  (via drill 0.51)
  Top 0.254: U5.P$26 54.31,12.4 53.85,11.94 39.12,11.94 37.08,13.97 v37.08,17.78 | U3.6 56.9,43.05 v58.17,41.78
  Bottom 0.254: v37.08,17.78 40.89,17.78 41.91,18.8 41.91,26.92 43.18,28.19 43.18,31.24 44.45,32.51 56.9,32.51 59.69,35.31 59.69,40.26 v58.17,41.78
EN_3.3V1  (via drill 0.51)
  Top 0.254: U7.P$26 119.59,12.4 119.13,11.94 104.39,11.94 102.36,13.97 v102.36,17.78 | U10.6 122.17,43.05 v123.44,41.78
  Bottom 0.254: v102.36,17.78 106.17,17.78 107.19,18.8 107.19,26.92 108.46,28.19 108.46,31.24 109.73,32.51 122.17,32.51 124.97,35.31 124.97,40.26 v123.44,41.78
EN_3.3V2  (via drill 0.51)
  Top 0.254: U13.P$26 54.31,66.25 53.85,65.79 39.12,65.79 37.08,67.82 v37.08,71.63 | U16.6 56.9,96.9 v58.17,95.63
  Bottom 0.254: v37.08,71.63 40.89,71.63 41.91,72.64 41.91,80.77 43.18,82.04 43.18,85.09 44.45,86.36 56.9,86.36 59.69,89.15 59.69,94.11 v58.17,95.63
EN_3.3V3  (via drill 0.51)
  Top 0.254: U19.P$26 119.59,66.25 119.13,65.79 104.39,65.79 102.36,67.82 v102.36,71.63 | U22.6 122.17,96.9 v123.44,95.63
  Bottom 0.254: v102.36,71.63 106.17,71.63 107.19,72.64 107.19,80.77 108.46,82.04 108.46,85.09 109.73,86.36 122.17,86.36 124.97,89.15 124.97,94.11 v123.44,95.63
EN_5V  (via drill 0.51)
  Top 0.254: U3.7 53.21,44.32 52.83,44.7 52.83,46.23 53.34,46.74 v55.63,46.74 | U2.D7 JP2.8
  Bottom 0.254: v55.63,46.74 54.1,45.21 48.77,45.21 48.26,45.72 48.26,49.78 47.24,50.8 45.47,50.8 JP2.8
EN_5V1  (via drill 0.51)
  Top 0.254: U10.7 118.49,44.32 118.11,44.7 118.11,46.23 118.62,46.74 v120.9,46.74 | U8.D7 JP7.8
  Bottom 0.254: v120.9,46.74 119.38,45.21 114.05,45.21 113.54,45.72 113.54,49.78 112.52,50.8 110.74,50.8 JP7.8
EN_5V2  (via drill 0.51)
  Top 0.254: U16.7 53.21,98.17 52.83,98.55 52.83,100.08 53.34,100.58 v55.63,100.58 | U14.D7 JP12.8
  Bottom 0.254: v55.63,100.58 54.1,99.06 48.77,99.06 48.26,99.57 48.26,103.63 47.24,104.65 45.47,104.65 JP12.8
EN_5V3  (via drill 0.51)
  Top 0.254: U22.7 118.49,98.17 118.11,98.55 118.11,100.08 118.62,100.58 v120.9,100.58 | U20.D7 JP17.8
  Bottom 0.254: v120.9,100.58 119.38,99.06 114.05,99.06 113.54,99.57 113.54,103.63 112.52,104.65 110.74,104.65 JP17.8
GND  (via drill 0.38, 0.51)
  Top 0.508: U3.8 56.64,45.59 57.91,46.86 v57.91,47.5
  other vias: 69.09,46.23 67.82,46.23 66.55,45.21 66.55,43.94 66.55,42.67 66.55,41.4 66.55,40.13 66.55,38.86 66.55,37.59 66.55,36.32 66.55,35.05 66.55,33.78 66.55,32.51 67.56,25.15 66.29,25.15 65.02,25.15 63.75,25.15 62.48,25.15 61.21,25.15 59.94,25.15 59.94,22.35 61.21,22.35 61.21,21.08 61.47,19.81 61.98,18.54 62.87,17.65 66.55,16.89 70.1,15.75 68.83,15.75 67.56,15.75 67.31,22.35 66.04,22.35 64.77,22.35 64.01,21.34 64.52,20.07 65.79,19.68 67.06,19.56 67.56,20.83 68.83,20.83 45.97,22.99 49.53,22.99 53.09,22.99 56.64,22.99 45.97,18.67 49.53,18.67 53.09,18.67 56.64,18.67 45.47,25.27 57.15,16.38 45.47,16.38 51.31,25.27 51.31,16.38 45.47,20.83 57.15,20.83 48.26,25.27 54.36,25.27 54.36,16.38 48.26,16.38 47.12,28.32 44.07,28.32 60.2,26.67 45.85,28.32 60.2,20.19 60.2,19.05 60.2,14.99 51.31,12.95 42.55,14.99 42.55,16.64 65.53,29.72 8.38,10.67 20.83,49.02 9.4,55.12 62.74,55.12 10.67,49.02 67.06,31.5 69.09,30.48 69.09,28.7 68.83,25.91 67.31,26.42 67.82,28.7 67.82,30.48 68.58,22.35 69.85,22.86 70.1,20.83 64.14,17.14 65.28,16.89 67.06,27.69 36.5,24.64 36.32,28.19 70.36,46.23 36.07,38.35 25.91,49.02 15.75,49.02 41.78,55.12 30.99,33.27 25.91,33.27 20.83,33.27 24.64,26.42 36.83,12.7 46.23,7.87 57.66,11.43 55.12,11.43 63.5,7.87 56.13,48.77 60.71,45.72 33.53,26.16 30.99,26.16 28.45,27.69 15.75,30.99 11.94,29.21 23.5,13.21 58.55,29.59 55.5,28.32 60.2,28.32 18.16,13.72
  pour Top (isolate 0.305, rank 6): 6.86,57.66 9.4,60.2 69.09,60.2 71.63,57.66 71.63,14.48 64.01,6.86 9.4,6.86 6.86,9.4
  pour Top (isolate 0.203): 71.63,32 66.8,32 66.8,26.16 59.44,26.16 59.44,21.84 61.72,21.84 61.72,18.8 64.77,15.75 71.63,15.75
  pour Bottom (isolate 0.305, rank 6): 6.86,57.66 9.4,60.2 69.09,60.2 71.63,57.66 71.63,14.48 64.01,6.86 9.4,6.86 6.86,9.4
GND1  (via drill 0.38, 0.51)
  Top 0.508: U10.8 121.92,45.59 123.19,46.86 v123.19,47.5
  other vias: 134.37,46.23 133.1,46.23 131.83,45.21 131.83,43.94 131.83,42.67 131.83,41.4 131.83,40.13 131.83,38.86 131.83,37.59 131.83,36.32 131.83,35.05 131.83,33.78 131.83,32.51 132.84,25.15 131.57,25.15 130.3,25.15 129.03,25.15 127.76,25.15 126.49,25.15 125.22,25.15 125.22,22.35 126.49,22.35 126.49,21.08 126.75,19.81 127.25,18.54 128.14,17.65 131.83,16.89 135.38,15.75 134.11,15.75 132.84,15.75 132.59,22.35 131.32,22.35 130.05,22.35 129.29,21.34 129.79,20.07 131.06,19.68 132.33,19.56 132.84,20.83 134.11,20.83 111.25,22.99 114.81,22.99 118.36,22.99 121.92,22.99 111.25,18.67 114.81,18.67 118.36,18.67 121.92,18.67 110.74,25.27 122.43,16.38 110.74,16.38 116.59,25.27 116.59,16.38 110.74,20.83 122.43,20.83 113.54,25.27 119.63,25.27 119.63,16.38 113.54,16.38 112.39,28.32 109.35,28.32 125.48,26.67 111.12,28.32 125.48,20.19 125.48,19.05 125.48,14.99 116.59,12.95 107.82,14.99 107.82,16.64 130.81,29.72 73.66,10.67 86.11,49.02 74.68,55.12 128.02,55.12 75.95,49.02 132.33,31.5 134.37,30.48 134.37,28.7 134.11,25.91 132.59,26.42 133.1,28.7 133.1,30.48 133.86,22.35 135.13,22.86 135.38,20.83 129.41,17.14 130.56,16.89 132.33,27.69 101.78,24.64 101.6,28.19 135.64,46.23 101.35,38.35 91.19,49.02 81.03,49.02 107.06,55.12 96.27,33.27 91.19,33.27 86.11,33.27 89.92,26.42 102.11,12.7 111.51,7.87 122.94,11.43 120.4,11.43 128.78,7.87 121.41,48.77 125.98,45.72 98.81,26.16 96.27,26.16 93.73,27.69 81.03,30.99 77.22,29.21 88.77,13.21 123.83,29.59 120.78,28.32 125.48,28.32 83.44,13.72
  pour Top (isolate 0.305, rank 6): 72.14,57.66 74.68,60.2 134.37,60.2 136.91,57.66 136.91,14.48 129.29,6.86 74.68,6.86 72.14,9.4
  pour Top (isolate 0.203): 136.91,32 132.08,32 132.08,26.16 124.71,26.16 124.71,21.84 127,21.84 127,18.8 130.05,15.75 136.91,15.75
  pour Bottom (isolate 0.305, rank 6): 72.14,57.66 74.68,60.2 134.37,60.2 136.91,57.66 136.91,14.48 129.29,6.86 74.68,6.86 72.14,9.4
GND2  (via drill 0.38, 0.51)
  Top 0.508: U16.8 56.64,99.44 57.91,100.71 v57.91,101.35
  other vias: 69.09,100.08 67.82,100.08 66.55,99.06 66.55,97.79 66.55,96.52 66.55,95.25 66.55,93.98 66.55,92.71 66.55,91.44 66.55,90.17 66.55,88.9 66.55,87.63 66.55,86.36 67.56,78.99 66.29,78.99 65.02,78.99 63.75,78.99 62.48,78.99 61.21,78.99 59.94,78.99 59.94,76.2 61.21,76.2 61.21,74.93 61.47,73.66 61.98,72.39 62.87,71.5 66.55,70.74 70.1,69.6 68.83,69.6 67.56,69.6 67.31,76.2 66.04,76.2 64.77,76.2 64.01,75.18 64.52,73.91 65.79,73.53 67.06,73.41 67.56,74.68 68.83,74.68 45.97,76.83 49.53,76.83 53.09,76.83 56.64,76.83 45.97,72.52 49.53,72.52 53.09,72.52 56.64,72.52 45.47,79.12 57.15,70.23 45.47,70.23 51.31,79.12 51.31,70.23 45.47,74.68 57.15,74.68 48.26,79.12 54.36,79.12 54.36,70.23 48.26,70.23 47.12,82.17 44.07,82.17 60.2,80.52 45.85,82.17 60.2,74.04 60.2,72.9 60.2,68.83 51.31,66.8 42.55,68.83 42.55,70.48 65.53,83.57 8.38,64.52 20.83,102.87 9.4,108.97 62.74,108.97 10.67,102.87 67.06,85.34 69.09,84.33 69.09,82.55 68.83,79.76 67.31,80.26 67.82,82.55 67.82,84.33 68.58,76.2 69.85,76.71 70.1,74.68 64.14,70.99 65.28,70.74 67.06,81.53 36.5,78.49 36.32,82.04 70.36,100.08 36.07,92.2 25.91,102.87 15.75,102.87 41.78,108.97 30.99,87.12 25.91,87.12 20.83,87.12 24.64,80.26 36.83,66.55 46.23,61.72 57.66,65.28 55.12,65.28 63.5,61.72 56.13,102.62 60.71,99.57 33.53,80.01 30.99,80.01 28.45,81.53 15.75,84.84 11.94,83.06 23.5,67.06 58.55,83.44 55.5,82.17 60.2,82.17 18.16,67.56
  pour Top (isolate 0.305, rank 6): 6.86,111.51 9.4,114.05 69.09,114.05 71.63,111.51 71.63,68.33 64.01,60.71 9.4,60.71 6.86,63.25
  pour Top (isolate 0.203): 71.63,85.85 66.8,85.85 66.8,80.01 59.44,80.01 59.44,75.69 61.72,75.69 61.72,72.64 64.77,69.6 71.63,69.6
  pour Bottom (isolate 0.305, rank 6): 6.86,111.51 9.4,114.05 69.09,114.05 71.63,111.51 71.63,68.33 64.01,60.71 9.4,60.71 6.86,63.25
GND3  (via drill 0.38, 0.51)
  Top 0.508: U22.8 121.92,99.44 123.19,100.71 v123.19,101.35
  other vias: 134.37,100.08 133.1,100.08 131.83,99.06 131.83,97.79 131.83,96.52 131.83,95.25 131.83,93.98 131.83,92.71 131.83,91.44 131.83,90.17 131.83,88.9 131.83,87.63 131.83,86.36 132.84,78.99 131.57,78.99 130.3,78.99 129.03,78.99 127.76,78.99 126.49,78.99 125.22,78.99 125.22,76.2 126.49,76.2 126.49,74.93 126.75,73.66 127.25,72.39 128.14,71.5 131.83,70.74 135.38,69.6 134.11,69.6 132.84,69.6 132.59,76.2 131.32,76.2 130.05,76.2 129.29,75.18 129.79,73.91 131.06,73.53 132.33,73.41 132.84,74.68 134.11,74.68 111.25,76.83 114.81,76.83 118.36,76.83 121.92,76.83 111.25,72.52 114.81,72.52 118.36,72.52 121.92,72.52 110.74,79.12 122.43,70.23 110.74,70.23 116.59,79.12 116.59,70.23 110.74,74.68 122.43,74.68 113.54,79.12 119.63,79.12 119.63,70.23 113.54,70.23 112.39,82.17 109.35,82.17 125.48,80.52 111.12,82.17 125.48,74.04 125.48,72.9 125.48,68.83 116.59,66.8 107.82,68.83 107.82,70.48 130.81,83.57 73.66,64.52 86.11,102.87 74.68,108.97 128.02,108.97 75.95,102.87 132.33,85.34 134.37,84.33 134.37,82.55 134.11,79.76 132.59,80.26 133.1,82.55 133.1,84.33 133.86,76.2 135.13,76.71 135.38,74.68 129.41,70.99 130.56,70.74 132.33,81.53 101.78,78.49 101.6,82.04 135.64,100.08 101.35,92.2 91.19,102.87 81.03,102.87 107.06,108.97 96.27,87.12 91.19,87.12 86.11,87.12 89.92,80.26 102.11,66.55 111.51,61.72 122.94,65.28 120.4,65.28 128.78,61.72 121.41,102.62 125.98,99.57 98.81,80.01 96.27,80.01 93.73,81.53 81.03,84.84 77.22,83.06 88.77,67.06 123.83,83.44 120.78,82.17 125.48,82.17 83.44,67.56
  pour Top (isolate 0.305, rank 6): 72.14,111.51 74.68,114.05 134.37,114.05 136.91,111.51 136.91,68.33 129.29,60.71 74.68,60.71 72.14,63.25
  pour Top (isolate 0.203): 136.91,85.85 132.08,85.85 132.08,80.01 124.71,80.01 124.71,75.69 127,75.69 127,72.64 130.05,69.6 136.91,69.6
  pour Bottom (isolate 0.305, rank 6): 72.14,111.51 74.68,114.05 134.37,114.05 136.91,111.51 136.91,68.33 129.29,60.71 74.68,60.71 72.14,63.25
INT_3.3V  (via drill 0.51)
  Top 0.254: U5.P$14 42.33,21.43 41.15,22.61 41.15,29.97 v40.13,30.99 | v50.04,47.5 50.55,46.99 50.55,41.15 51.82,39.88 51.82,38.1 48.77,35.05 v44.96,35.05 | U2.D2 JP2.3
  Bottom 0.254: v40.13,30.99 40.13,32.26 42.93,35.05 v44.96,35.05 | v50.04,47.5 51.31,47.5 JP2.3
INT_3.3V1  (via drill 0.51)
  Top 0.254: U7.P$14 107.6,21.43 106.43,22.61 106.43,29.97 v105.41,30.99 | v115.32,47.5 115.82,46.99 115.82,41.15 117.09,39.88 117.09,38.1 114.05,35.05 v110.24,35.05 | U8.D2 JP7.3
  Bottom 0.254: v105.41,30.99 105.41,32.26 108.2,35.05 v110.24,35.05 | v115.32,47.5 116.59,47.5 JP7.3
INT_3.3V2  (via drill 0.51)
  Top 0.254: U13.P$14 42.33,75.28 41.15,76.45 41.15,83.82 v40.13,84.84 | v50.04,101.35 50.55,100.84 50.55,95 51.82,93.73 51.82,91.95 48.77,88.9 v44.96,88.9 | U14.D2 JP12.3
  Bottom 0.254: v40.13,84.84 40.13,86.11 42.93,88.9 v44.96,88.9 | v50.04,101.35 51.31,101.35 JP12.3
INT_3.3V3  (via drill 0.51)
  Top 0.254: U19.P$14 107.6,75.28 106.43,76.45 106.43,83.82 v105.41,84.84 | v115.32,101.35 115.82,100.84 115.82,95 117.09,93.73 117.09,91.95 114.05,88.9 v110.24,88.9 | U20.D2 JP17.3
  Bottom 0.254: v105.41,84.84 105.41,86.11 108.2,88.9 v110.24,88.9 | v115.32,101.35 116.59,101.35 JP17.3
MISO_3.3V  (via drill 0.51)
  Top 0.254: U4.7 14.68,26.11 v18.29,29.72 | U2.D12 JP3.5 29.72,50.04 30.73,49.02 43.69,49.02 44.7,48.01 44.7,38.1 v43.69,37.08 | U6.4 58.61,34.61 58.17,35.05 v55.8,35.05 | JP4.1 58.93,39.88 57.66,39.88 56.64,38.86 v56.64,37.08
  Bottom 0.254: 54.1,35.05 51.82,35.05 49.78,37.08 v43.69,37.08 41.15,37.08 35.05,30.99 19.56,30.99 v18.29,29.72 | 54.1,35.05 v55.8,35.05 | v56.64,37.08 54.86,37.08 54.1,36.32 54.1,35.05
MISO_3.3V1  (via drill 0.51)
  Top 0.254: U11.7 79.96,26.11 v83.57,29.72 | U8.D12 JP8.5 95,50.04 96.01,49.02 108.97,49.02 109.98,48.01 109.98,38.1 v108.97,37.08 | U12.4 123.89,34.61 123.44,35.05 v121.08,35.05 | JP9.1 124.21,39.88 122.94,39.88 121.92,38.86 v121.92,37.08
  Bottom 0.254: 119.38,35.05 117.09,35.05 115.06,37.08 v108.97,37.08 106.43,37.08 100.33,30.99 84.84,30.99 v83.57,29.72 | 119.38,35.05 v121.08,35.05 | v121.92,37.08 120.14,37.08 119.38,36.32 119.38,35.05
MISO_3.3V2  (via drill 0.51)
  Top 0.254: U17.7 14.68,79.96 v18.29,83.57 | U14.D12 JP13.5 29.72,103.89 30.73,102.87 43.69,102.87 44.7,101.85 44.7,91.95 v43.69,90.93 | U18.4 58.61,88.46 58.17,88.9 v55.8,88.9 | JP14.1 58.93,93.73 57.66,93.73 56.64,92.71 v56.64,90.93
  Bottom 0.254: 54.1,88.9 51.82,88.9 49.78,90.93 v43.69,90.93 41.15,90.93 35.05,84.84 19.56,84.84 v18.29,83.57 | 54.1,88.9 v55.8,88.9 | v56.64,90.93 54.86,90.93 54.1,90.17 54.1,88.9
MISO_3.3V3  (via drill 0.51)
  Top 0.254: U23.7 79.96,79.96 v83.57,83.57 | U20.D12 JP18.5 95,103.89 96.01,102.87 108.97,102.87 109.98,101.85 109.98,91.95 v108.97,90.93 | U24.4 123.89,88.46 123.44,88.9 v121.08,88.9 | JP19.1 124.21,93.73 122.94,93.73 121.92,92.71 v121.92,90.93
  Bottom 0.254: 119.38,88.9 117.09,88.9 115.06,90.93 v108.97,90.93 106.43,90.93 100.33,84.84 84.84,84.84 v83.57,83.57 | 119.38,88.9 v121.08,88.9 | v121.92,90.93 120.14,90.93 119.38,90.17 119.38,88.9
MOSI_3.3V  (via drill 0.51)
  Top 0.254: U4.3 18.93,21.71 22.1,18.54 v22.1,13.21 | U3.12 45.85,41.78 45.47,41.4 45.47,37.08 43.94,35.56 42.67,35.56 38.86,31.75 38.86,30.23 40.39,28.7 40.39,20.07 v40.89,19.56 41.56,20.23 U5.P$15
  Bottom 0.254: v40.89,19.56 36.32,19.56 35.31,18.54 35.31,15.75 34.29,14.73 23.62,14.73 v22.1,13.21
MOSI_3.3V1  (via drill 0.51)
  Top 0.254: U11.3 84.21,21.71 87.38,18.54 v87.38,13.21 | U10.12 111.12,41.78 110.74,41.4 110.74,37.08 109.22,35.56 107.95,35.56 104.14,31.75 104.14,30.23 105.66,28.7 105.66,20.07 v106.17,19.56 106.84,20.23 U7.P$15
  Bottom 0.254: v106.17,19.56 101.6,19.56 100.58,18.54 100.58,15.75 99.57,14.73 88.9,14.73 v87.38,13.21
MOSI_3.3V2  (via drill 0.51)
  Top 0.254: U17.3 18.93,75.56 22.1,72.39 v22.1,67.06 | U16.12 45.85,95.63 45.47,95.25 45.47,90.93 43.94,89.41 42.67,89.41 38.86,85.6 38.86,84.07 40.39,82.55 40.39,73.91 v40.89,73.41 41.56,74.08 U13.P$15
  Bottom 0.254: v40.89,73.41 36.32,73.41 35.31,72.39 35.31,69.6 34.29,68.58 23.62,68.58 v22.1,67.06
MOSI_3.3V3  (via drill 0.51)
  Top 0.254: U23.3 84.21,75.56 87.38,72.39 v87.38,67.06 | U22.12 111.12,95.63 110.74,95.25 110.74,90.93 109.22,89.41 107.95,89.41 104.14,85.6 104.14,84.07 105.66,82.55 105.66,73.91 v106.17,73.41 106.84,74.08 U19.P$15
  Bottom 0.254: v106.17,73.41 101.6,73.41 100.58,72.39 100.58,69.6 99.57,68.58 88.9,68.58 v87.38,67.06
MOSI_5V  (via drill 0.51)
  Top 0.254: U3.11 v46.23,43.05 | U2.D11 JP3.4 | JP4.4 65.53,36.32 65.53,39.37 59.69,45.21 59.69,47.24 57.15,49.78 v46.23,49.78
  Bottom 0.254: v46.23,43.05 45.72,43.56 45.72,48.77 45.47,49.02 | 45.47,49.02 44.45,50.04 33.27,50.04 32.26,51.05 JP3.4 | v46.23,49.78 45.47,49.02
MOSI_5V1  (via drill 0.51)
  Top 0.254: U10.11 v111.51,43.05 | U8.D11 JP8.4 | JP9.4 130.81,36.32 130.81,39.37 124.97,45.21 124.97,47.24 122.43,49.78 v111.51,49.78
  Bottom 0.254: v111.51,43.05 111,43.56 111,48.77 110.74,49.02 | 110.74,49.02 109.73,50.04 98.55,50.04 97.54,51.05 JP8.4 | v111.51,49.78 110.74,49.02
MOSI_5V2  (via drill 0.51)
  Top 0.254: U16.11 v46.23,96.9 | U14.D11 JP13.4 | JP14.4 65.53,90.17 65.53,93.22 59.69,99.06 59.69,101.09 57.15,103.63 v46.23,103.63
  Bottom 0.254: v46.23,96.9 45.72,97.41 45.72,102.62 45.47,102.87 | 45.47,102.87 44.45,103.89 33.27,103.89 32.26,104.9 JP13.4 | v46.23,103.63 45.47,102.87
MOSI_5V3  (via drill 0.51)
  Top 0.254: U22.11 v111.51,96.9 | U20.D11 JP18.4 | JP19.4 130.81,90.17 130.81,93.22 124.97,99.06 124.97,101.09 122.43,103.63 v111.51,103.63
  Bottom 0.254: v111.51,96.9 111,97.41 111,102.62 110.74,102.87 | 110.74,102.87 109.73,103.89 98.55,103.89 97.54,104.9 JP18.4 | v111.51,103.63 110.74,102.87
N$1
  Top 0.508: R7.2 R6.1 99.15,21.25 98.81,21.59 98.81,22.35 98.5,22.66 U9.1
N$2
  Top 0.508: R2.2 R1.1 33.87,21.25 33.53,21.59 33.53,22.35 33.22,22.66 U1.1
N$3
  Top 0.254: U5.P$5 51.91,28.03 53.85,29.97 SJ1.2
N$4
  Top 0.254: U5.P$7 49.51,28.68 50.29,29.46 52.58,29.46 53.03,29.92 SJ1.1
N$5
  Top 0.991: C7.2 70.36,27.39 L2.1 70.36,27.37 70.36,26.34 | C6.1 65.73,23.82
  Top 1.219: 65.73,23.82 67.84,23.82 arc90 70.36,26.34
N$6
  Top 0.254: U5.P$27 55.51,13.33 55.88,12.95 56.39,12.95 56.71,13.27 U5.P$28
N$7
  Top 0.254: U5.P$30 60.4,17.83 60.71,17.53 60.71,17.02 60.32,16.63 U5.P$29
N$8
  Top 0.66: 59.82,23.82 U5.P$35
  Top 0.965: C8.1 C6.2
  Top 0.991: C6.2 61.65,23.82
  Top 1.219: 61.65,23.82 59.82,23.82
N$9
  Top 0.991: C8.2 62.71,20.98 | 66.37,18.29 J1.P$3
  Top 1.219: 62.71,20.98 arc90 65.41,18.29 66.37,18.29
N$10
  Top 0.991: C7.1 70.36,31.99 L1.1 70.34,34.59 AE1.FEED
N$11
  Top 0.508: R3.1 22.1,8.89 21.84,8.64 19.81,8.64 19.56,8.89 D1.A
N$17  (via drill 1.02 pad 1.91)
  other vias: 9.4,47.5
N$18  (via drill 1.02 pad 1.91)
  other vias: 9.4,44.96
N$19  (via drill 1.02 pad 1.91)
  other vias: 9.4,42.42
N$35
  Top 0.254: U7.P$5 117.19,28.03 119.13,29.97 SJ2.2
N$36
  Top 0.254: U7.P$7 114.79,28.68 115.57,29.46 117.86,29.46 118.31,29.92 SJ2.1
N$37
  Top 0.254: U7.P$27 120.79,13.33 121.16,12.95 121.67,12.95 121.99,13.27 U7.P$28
N$38
  Top 0.254: U7.P$30 125.68,17.83 125.98,17.53 125.98,17.02 125.59,16.63 U7.P$29
N$39
  Top 0.991: C14.2 135.64,27.39 L4.1 135.64,27.37 135.64,26.34 | C12.1 131.01,23.82
  Top 1.219: 131.01,23.82 133.12,23.82 arc90 135.64,26.34
N$40  (via drill 1.02 pad 1.91)
  other vias: 42.42,39.88
N$41  (via drill 1.02 pad 1.91)
  other vias: 37.34,39.88
N$42  (via drill 1.02 pad 1.91)
  other vias: 39.88,39.88
N$43  (via drill 1.02 pad 1.91)
  other vias: 34.8,39.88
N$44  (via drill 1.02 pad 1.91)
  other vias: 32.26,39.88
N$45  (via drill 1.02 pad 1.91)
  other vias: 29.72,39.88
N$46  (via drill 1.02 pad 1.91)
  other vias: 27.18,39.88
N$47  (via drill 1.02 pad 1.91)
  other vias: 24.64,39.88
N$48  (via drill 1.02 pad 1.91)
  other vias: 19.56,39.88
N$49  (via drill 1.02 pad 1.91)
  other vias: 22.1,39.88
N$50  (via drill 1.02 pad 1.91)
  other vias: 17.02,39.88
N$51  (via drill 1.02 pad 1.91)
  other vias: 14.48,39.88
N$52  (via drill 1.02 pad 1.91)
  other vias: 11.94,39.88
N$53  (via drill 1.02 pad 1.91)
  other vias: 9.4,39.88
N$54  (via drill 1.02 pad 1.91)
  other vias: 11.94,42.42
N$55  (via drill 1.02 pad 1.91)
  other vias: 11.94,44.96
N$56  (via drill 1.02 pad 1.91)
  other vias: 11.94,47.5
N$57  (via drill 1.02 pad 1.91)
  other vias: 14.48,47.5
N$58  (via drill 1.02 pad 1.91)
  other vias: 14.48,44.96
N$59  (via drill 1.02 pad 1.91)
  other vias: 14.48,42.42
N$60  (via drill 1.02 pad 1.91)
  other vias: 17.02,42.42
N$61  (via drill 1.02 pad 1.91)
  other vias: 17.02,44.96
N$62  (via drill 1.02 pad 1.91)
  other vias: 17.02,47.5
N$63  (via drill 1.02 pad 1.91)
  other vias: 19.56,47.5
N$64  (via drill 1.02 pad 1.91)
  other vias: 19.56,44.96
N$65  (via drill 1.02 pad 1.91)
  other vias: 19.56,42.42
N$66  (via drill 1.02 pad 1.91)
  other vias: 22.1,42.42
N$67  (via drill 1.02 pad 1.91)
  other vias: 22.1,44.96
N$68  (via drill 1.02 pad 1.91)
  other vias: 22.1,47.5
N$69  (via drill 1.02 pad 1.91)
  other vias: 24.64,47.5
N$70  (via drill 1.02 pad 1.91)
  other vias: 24.64,44.96
N$71  (via drill 1.02 pad 1.91)
  other vias: 24.64,42.42
N$72  (via drill 1.02 pad 1.91)
  other vias: 27.18,42.42
N$73  (via drill 1.02 pad 1.91)
  other vias: 27.18,44.96
N$75  (via drill 1.02 pad 1.91)
  other vias: 29.72,47.5
N$76  (via drill 1.02 pad 1.91)
  other vias: 29.72,44.96
N$77  (via drill 1.02 pad 1.91)
  other vias: 29.72,42.42
N$78  (via drill 1.02 pad 1.91)
  other vias: 32.26,42.42
N$79  (via drill 1.02 pad 1.91)
  other vias: 32.26,44.96
N$80  (via drill 1.02 pad 1.91)
  other vias: 32.26,47.5
N$81  (via drill 1.02 pad 1.91)
  other vias: 34.8,47.5
N$82  (via drill 1.02 pad 1.91)
  other vias: 34.8,44.96
N$83  (via drill 1.02 pad 1.91)
  other vias: 34.8,42.42
N$84  (via drill 1.02 pad 1.91)
  other vias: 37.34,42.42
N$85  (via drill 1.02 pad 1.91)
  other vias: 37.34,47.5
N$86  (via drill 1.02 pad 1.91)
  other vias: 37.34,44.96
N$87  (via drill 1.02 pad 1.91)
  other vias: 39.88,47.5
N$88  (via drill 1.02 pad 1.91)
  other vias: 39.88,44.96
N$89  (via drill 1.02 pad 1.91)
  other vias: 39.88,42.42
N$90  (via drill 1.02 pad 1.91)
  other vias: 42.42,42.42
N$91  (via drill 1.02 pad 1.91)
  other vias: 42.42,44.96
N$92  (via drill 1.02 pad 1.91)
  other vias: 42.42,47.5
N$93
  Top 0.991: C14.1 135.64,31.99 L3.1 135.62,34.59 AE2.FEED
N$94
  Top 0.991: C13.2 127.99,20.98 | 131.65,18.29 J2.P$3
  Top 1.219: 127.99,20.98 arc90 130.68,18.29 131.65,18.29
N$95
  Top 0.508: R8.1 87.38,8.89 87.12,8.64 85.09,8.64 84.84,8.89 D2.A
N$96  (via drill 1.02 pad 1.91)
  other vias: 32.26,37.34
N$97  (via drill 1.02 pad 1.91)
  other vias: 32.26,34.8
N$98  (via drill 1.02 pad 1.91)
  other vias: 29.72,34.8
N$99  (via drill 1.02 pad 1.91)
  other vias: 29.72,37.34
N$100  (via drill 1.02 pad 1.91)
  other vias: 27.18,37.34
N$101  (via drill 1.02 pad 1.91)
  other vias: 27.18,34.8
N$102  (via drill 1.02 pad 1.91)
  other vias: 24.64,34.8
N$103  (via drill 1.02 pad 1.91)
  other vias: 24.64,37.34
N$104  (via drill 1.02 pad 1.91)
  other vias: 22.1,37.34
N$105  (via drill 1.02 pad 1.91)
  other vias: 22.1,34.8
N$106  (via drill 1.02 pad 1.91)
  other vias: 19.56,34.8
N$107  (via drill 1.02 pad 1.91)
  other vias: 19.56,37.34
N$108  (via drill 1.02 pad 1.91)
  other vias: 17.02,37.34
N$109  (via drill 1.02 pad 1.91)
  other vias: 17.02,34.8
N$110  (via drill 1.02 pad 1.91)
  other vias: 14.48,34.8
N$111  (via drill 1.02 pad 1.91)
  other vias: 14.48,37.34
N$112  (via drill 1.02 pad 1.91)
  other vias: 11.94,37.34
N$113  (via drill 1.02 pad 1.91)
  other vias: 11.94,34.8
N$114  (via drill 1.02 pad 1.91)
  other vias: 9.4,34.8
N$115  (via drill 1.02 pad 1.91)
  other vias: 9.4,37.34
N$116  (via drill 1.02 pad 1.91)
  other vias: 27.18,47.5
N$125
  Top 0.254: U2.RX JP2.1
N$126
  Top 0.254: U2.TX JP2.2